# Altium PCB 探测器终.PcbDoc (part 2 of 2)
Units mil, origin at the board's own origin, x right, y up, seen from the top; angles counter-clockwise.
Board outline 3557.03 x 1964.03 mil, 2 copper layers (Top Layer, Bottom Layer); 61 components, 44 nets, 225 pads, 13 vias.
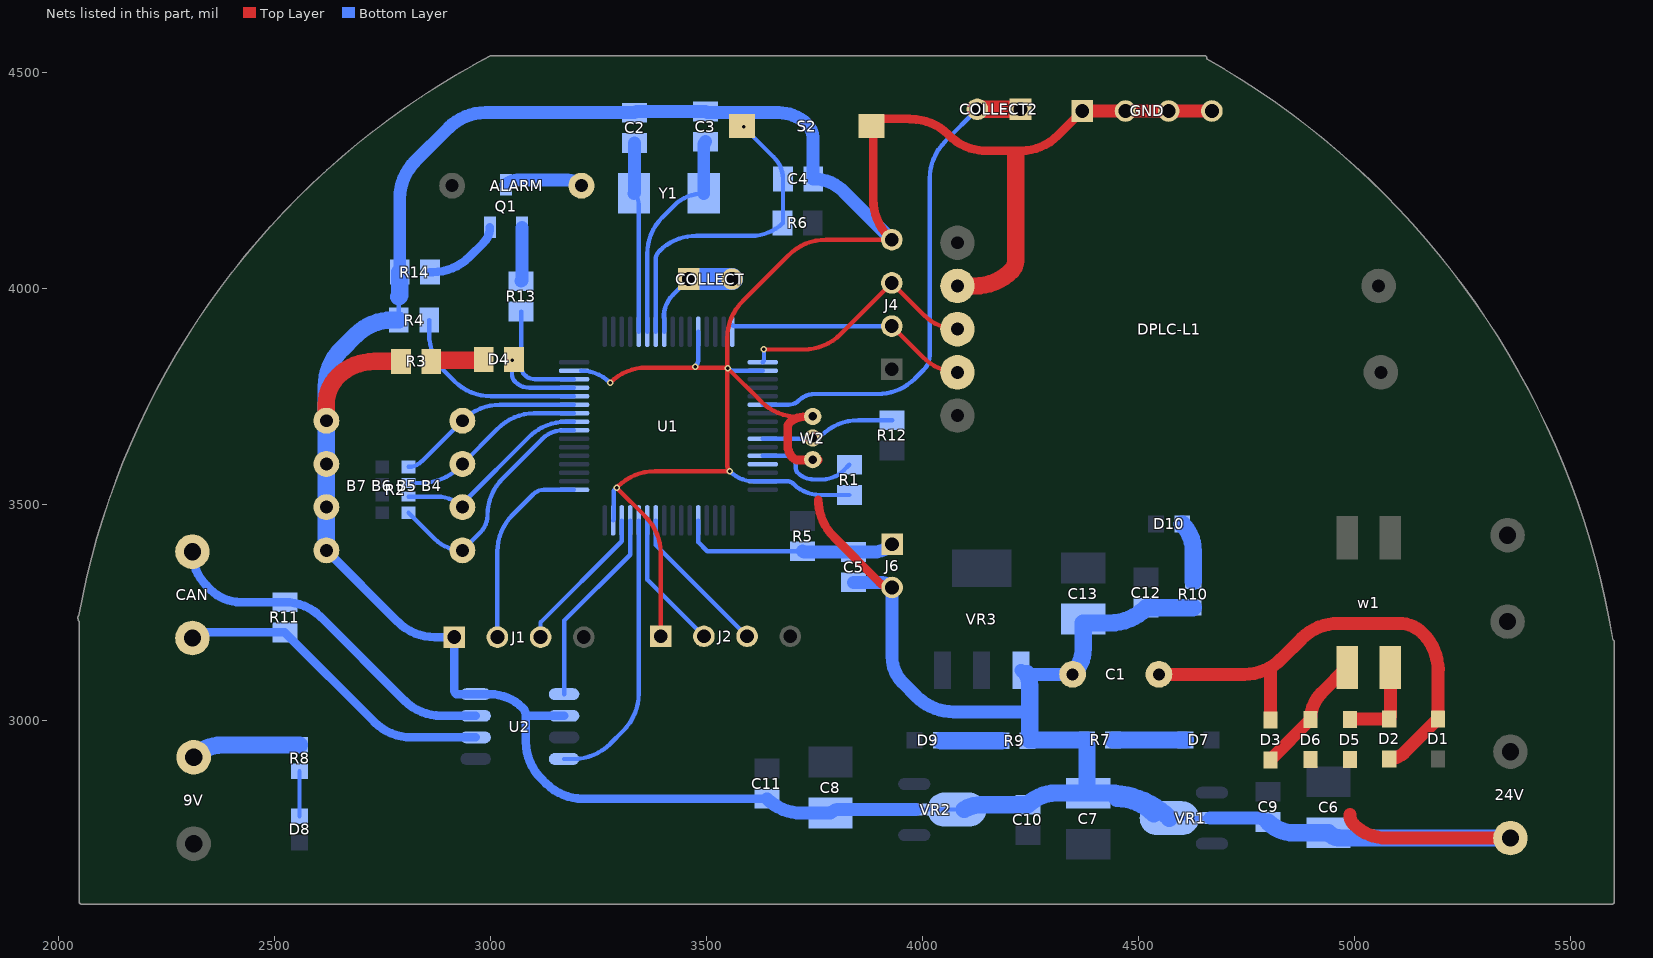
[diagram p2: the nets of this part, all layers, seen from the top]

## Via types
v1: diameter 15, hole 8, Top Layer to Bottom Layer, 8 vias
v2: diameter 137.8, hole 118.11, Top Layer to Bottom Layer, 3 vias
v3: diameter 30, hole 15, Top Layer to Bottom Layer, 1 vias
v4: diameter 50, hole 28, Top Layer to Bottom Layer, 1 vias

## Nets (pads, with @x,y where several pads share a name; then routed paths per layer and width w, separated by ;. In a path a pad name is that pad's centre, name@x,y a point inside that pad or via, vN(x,y) a via of type N, cw(c..) or ccw(c..) an arc to the next point about the centre after c; other vN are vias at no path point) (continued)
GND: 9V.2 24V.2 "B7 B6 B5 B4.5" "B7 B6 B5 B4.6" "B7 B6 B5 B4.7" "B7 B6 B5 B4.8" C1.2 C2.1 C3.1 C4.1 C5.1 C6.2 C7.2 C8.2 C9.1 C10.1 C11.1 C12.2 C13.1 D5.1 D6.1 DPLC-L1.4 GND.1 GND.2 GND.3 GND.4 J1.1 J2.1 J4.4 J6.2 R1.1 R3.1 R4.1 R7.1 R8.1 R9.1 R10.1 R14.2 S2.1 U1.12 U1.18 U1.31 U1.47 U1.63 U2.2 U2.8 VR1.2 VR2.2 VR3.1 W2.1 W2.3 | length 16067
  Top Layer w10: v1(3292.52,3540) 3359.16,3473.36 ; J2.1@3394.52,3196 3394.52,3388 ; v1@3474.52,3818 3362.02,3818 ; v1(3549.52,3817) 3627.16,3739.36 ; W2.3@3759.52,3704 3724.9,3704 3712.52,3704 ; J4.4@3929.52,4114 3776.52,4114 ; 3359.16,3473.36 cw(c3273.81,3388) 3394.52,3388 ; 3359.16,3473.36 cw(c3273.81,3388) 3394.52,3388 ; 3362.02,3818 ccw(c3362.02,3698.5) v1(3277.52,3783) cw(c3362.02,3698.5) 3362.02,3818 ; 3380.52,3578 ccw(c3380.52,3457.29) 3295.16,3542.64 cw(c3380.52,3457.29) 3380.52,3578 ; 3380.52,3578 v1(3554.52,3578) ; v1@3479.35,3818 cw(c3479.35,3824.83) v1(3474.52,3820) ccw(c3479.35,3824.83) v1@3479.35,3818 ; v1@3479.35,3818 v1@3548.52,3818 ; 3548.52,3592.49 ccw(c3569.01,3592.49) v1(3554.52,3578) ; 3548.52,3592.49 ccw(c3569.01,3592.49) v1(3554.52,3578) ; 3548.52,3592.49 v1@3548.52,3818 ; v1@3548.52,3818 3548.52,3886 ; 3548.52,3886 cw(c3669.23,3886) 3583.88,3971.36 ; 3548.52,3886 cw(c3669.23,3886) 3583.88,3971.36 ; 3583.88,3971.36 3691.16,4078.64 ; 3627.16,3739.36 ccw(c3712.52,3824.71) 3712.52,3704 ; 3627.16,3739.36 ccw(c3712.52,3824.71) 3712.52,3704 ; 3691.16,4078.64 cw(c3776.52,3993.29) 3776.52,4114 ; 3691.16,4078.64 cw(c3776.52,3993.29) 3776.52,4114
  Top Layer w20: 3759.52,3512 ccw(c3880.23,3512) 3765.91,3473.24 ; W2.1@3759.52,3604 3712.59,3604 ; J4.4@3929.52,4114 J4.4@3921.88,4121.64 ; GND.1@4370.52,4412 4313.88,4355.36 ; 3688.52,3678.93 cw(c3705.59,3678.93) 3693.52,3691 ; 3688.52,3678.93 cw(c3705.59,3678.93) 3693.52,3691 ; 3688.52,3678.93 3688.52,3637.97 ccw(c3729.49,3637.97) 3696.52,3613.65 ; 3693.52,3691 cw(c3724.9,3659.62) 3724.9,3704 ccw(c3724.9,3659.62) 3693.52,3691 ; 3696.52,3613.65 ccw(c3729.49,3637.97) 3700.52,3609 ; 3696.52,3613.65 ccw(c3729.49,3637.97) 3700.52,3609 ; 3700.52,3609 ccw(c3712.59,3621.07) 3712.59,3604 ; 3700.52,3609 ccw(c3712.59,3621.07) 3712.59,3604 ; 3765.91,3473.24 ccw(c3880.23,3512) 3794.88,3426.64 ; 3765.91,3473.24 ccw(c3880.23,3512) 3794.88,3426.64 ; 3794.88,3426.64 3900.05,3321.47 ; 3886.52,4207 ccw(c4007.23,4207) J4.4@3921.88,4121.64 ; 3886.52,4207 ccw(c4007.23,4207) J4.4@3921.88,4121.64 ; 3886.52,4207 3886.52,4394 3969.11,4394 ; 3900.05,3321.47 ccw(c3930.15,3351.57) J6.2@3930.15,3309 cw(c3930.15,3351.57) 3900.05,3321.47 ; 3969.11,4394 cw(c3969.11,4390.59) 3970.33,4393.77 cw(c3969.11,4390.59) 3971.52,4393 ; 3969.11,4394 cw(c3969.11,4390.59) 3971.52,4393 ; 3971.52,4393 3974.52,4393 ; 3974.52,4393 cw(c3974.52,4272.29) 4059.88,4357.64 ; 3974.52,4393 cw(c3974.52,4272.29) 4059.88,4357.64 ; 4059.88,4357.64 4062.16,4355.36 ; 4062.16,4355.36 ccw(c4147.52,4440.71) 4131.44,4321.08 ; 4062.16,4355.36 ccw(c4147.52,4440.71) 4131.44,4321.08 ; 4131.44,4321.08 ccw(c4147.52,4440.71) 4147.52,4320 ; 4131.44,4321.08 ccw(c4147.52,4440.71) 4147.52,4320 ; 4147.52,4320 4228.52,4320 ; 4228.52,4320 ccw(c4228.52,4440.71) 4313.88,4355.36 ; 4228.52,4320 ccw(c4228.52,4440.71) 4313.88,4355.36
  Top Layer w30: GND.1@4370.52,4412 GND.2@4470.52,4412 GND.3@4570.52,4412 GND.4@4670.52,4412 ; 4989.95,2783.1 ccw(c5022.62,2783.1) 4989.99,2781.53 ; 24V.2@5361.52,2729 5074.36,2729 ; 4989.99,2781.53 ccw(c5022.62,2783.1) 4999.52,2760 ; 4989.99,2781.53 ccw(c5022.62,2783.1) 4999.52,2760 ; 4999.52,2760 ccw(c5074.36,2834.84) 5034.88,2736.64 ; 4999.52,2760 ccw(c5074.36,2834.84) 5034.88,2736.64 ; 5034.88,2736.64 ccw(c5074.36,2834.84) 5074.36,2729 ; 5034.88,2736.64 ccw(c5074.36,2834.84) 5074.36,2729
  Top Layer w40: 2620.52,3695 2620.52,3734.21 ; R3.1@2793.48,3832.37 2731.89,3832.37 ; DPLC-L1.4@4081.52,4007 4121.52,4007 ; 4216.52,4306 4216.52,4065.64 ; 2620.52,3734.21 cw(c2709.34,3734.21) 2646.53,3797.01 ; 2620.52,3734.21 cw(c2709.34,3734.21) 2646.53,3797.01 ; 2646.53,3797.01 cw(c2731.89,3711.66) 2731.89,3832.37 ; 2646.53,3797.01 cw(c2731.89,3711.66) 2731.89,3832.37 ; 4121.52,4007 ccw(c4121.52,4127.71) 4206.88,4042.36 ; 4121.52,4007 ccw(c4121.52,4127.71) 4206.88,4042.36 ; 4206.88,4042.36 ccw(c4183.59,4065.64) 4216.52,4065.64 ; 4206.88,4042.36 ccw(c4183.59,4065.64) 4216.52,4065.64
  Bottom Layer w10: R4.1@2788.48,3928.01 2788.48,3982 ; U2.8@2999.37,3062 3020.52,3062 ; 3074.76,3030.76 3093.52,3012 ; U1.63@3210.64,3810.7 cw(c3210.64,3716.12) v1(3277.52,3783) ; U1.47@3284.57,3464.24 cw(c3284.68,3464.36) 3284.52,3464.36 3285.74,3465.58 3285.74,3533.22 v1(3292.52,3540) ; U1.12@3481.42,3901.25 3481.42,3836.65 ; U1.18@3631.02,3810.7 3564.72,3810.7 ; R1.1@3831.14,3522.96 3764.39,3522.96 ; VR2.2@3985.46,2795 VR2.2@4079.95,2795 VR2.2@4097.49,2795 ; VR1.2@4572.09,2775 VR1.2@4666.58,2775 ; 3481.42,3836.65 cw(c3457.87,3836.65) v1(3474.52,3820) ccw(c3457.87,3836.65) 3481.42,3836.65 ; 3564.72,3810.7 cw(c3564.72,3832.2) v1(3549.52,3817) ccw(c3564.72,3832.2) 3564.72,3810.7 ; U1.31@3610.54,3554.8 cw(c3610.54,3634.02) v1(3554.52,3578) ccw(c3610.54,3634.02) U1.31@3610.54,3554.8 ; U1.31@3610.54,3554.8 U1.31@3631.02,3554.8 3687.53,3554.8 ; 3687.53,3554.8 cw(c3687.53,3535.01) 3701.52,3549 ; 3687.53,3554.8 cw(c3687.53,3535.01) 3701.52,3549 ; 3701.52,3549 ccw(c3764.39,3611.87) 3764.39,3522.96 ; 3701.52,3549 ccw(c3764.39,3611.87) 3764.39,3522.96
  Bottom Layer w20: 2620.52,3395 2786.16,3229.36 ; 3093.52,3012 U2.2@3170.88,3012 ; C11.1@3640.52,2819.96 3214.49,2819.96 ; 2786.16,3229.36 ccw(c2871.52,3314.71) 2871.52,3194 ; 2786.16,3229.36 ccw(c2871.52,3314.71) 2871.52,3194 ; 2871.52,3194 J1.1@2916.52,3194 2916.52,3072.66 ; 2916.52,3072.66 ccw(c2930.18,3072.66) 2920.52,3063 ; 2916.52,3072.66 ccw(c2930.18,3072.66) 2920.52,3063 ; 2920.52,3063 ccw(c2922.93,3065.41) 2922.93,3062 ; 2920.52,3063 ccw(c2922.93,3065.41) 2922.93,3062 ; 2922.93,3062 U2.8@2966.16,3062 U2.8@2999.37,3062 ; U2.8@2999.37,3062 cw(c2999.37,2955.4) 3074.74,3030.78 ccw(c2999.37,2955.4) U2.8@2999.37,3062 ; 3082.52,3012 ccw(c3055.96,3012) 3074.76,3030.76 cw(c3055.96,3012) 3082.52,3012 ; 3082.52,3012 3082.52,2951.93 ccw(c3203.23,2951.93) 3117.88,2866.58 3129.14,2855.32 ; 3129.14,2855.32 ccw(c3214.49,2940.67) 3214.49,2819.96 ; 3129.14,2855.32 ccw(c3214.49,2940.67) 3214.49,2819.96
  Bottom Layer w30: R14.2@2790.48,4039 2790.48,4209.96 ; 3817.46,4226.06 ccw(c3747.56,4156.11) 3798.28,4241 ; 3817.48,4226.04 J4.4@3929.52,4114 ; C5.1@3841.15,3320.96 3901.28,3320.96 ; VR2.2@3985.46,2795 C8.2@3807.05,2795 ; 4238.52,3021 4072.52,3021 ; C1.2@4347.95,3108 4250.88,3108 ; VR1.2@4666.58,2775 C9.1@4778.7,2775 ; 2790.48,4209.96 cw(c2911.19,4209.96) 2825.84,4295.32 ; 2790.48,4209.96 cw(c2911.19,4209.96) 2825.84,4295.32 ; 2825.84,4295.32 2903.2,4372.68 ; 2903.2,4372.68 cw(c2988.56,4287.33) 2988.56,4408.04 ; 2903.2,4372.68 cw(c2988.56,4287.33) 2988.56,4408.04 ; 2988.56,4408.04 C2.1@3334.23,4408.04 ; C2.1@3334.23,4408.04 cw(c3341.47,4400.8) C2.1@3341.47,4411.04 ; C2.1@3334.23,4408.04 cw(c3341.47,4400.8) C2.1@3341.47,4411.04 ; C2.1@3341.47,4411.04 C3.1@3498.23,4411.04 ; C3.1@3498.23,4411.04 ccw(c3505.57,4418.38) C3.1@3505.57,4408 ; C3.1@3498.23,4411.04 ccw(c3505.57,4418.38) C3.1@3505.57,4408 ; C3.1@3505.57,4408 3668.34,4408 ; 3668.34,4408 cw(c3668.34,4315.82) 3709.03,4398.53 ; 3668.34,4408 cw(c3668.34,4315.82) 3709.03,4398.53 ; 3709.03,4398.53 cw(c3668.34,4315.82) 3733.52,4381 cw(c3699.62,4347.1) 3745,4362.56 ; 3720.3,2786.91 cw(c3720.3,2899.74) C11.1@3640.52,2819.96 ccw(c3720.3,2899.74) 3720.3,2786.91 ; 3720.3,2786.91 C8.2@3787.52,2786.91 ; 3745,4362.56 cw(c3699.62,4347.1) 3747.56,4347.1 ; 3745,4362.56 cw(c3699.62,4347.1) 3747.56,4347.1 ; C4.1@3747.56,4255 cw(c3747.56,4156.11) 3798.28,4241 ; C4.1@3747.56,4255 cw(c3747.56,4156.11) 3798.28,4241 ; C4.1@3747.56,4255 3747.56,4347.1 ; C8.2@3787.52,2786.91 cw(c3807.05,2767.39) C8.2@3807.05,2795 ; C8.2@3787.52,2786.91 cw(c3807.05,2767.39) C8.2@3807.05,2795 ; 3901.28,3320.96 cw(c3901.28,3280.13) J6.2@3930.15,3309 ; 3901.28,3320.96 cw(c3901.28,3280.13) J6.2@3930.15,3309 ; J6.2@3930.15,3309 3930.15,3147.83 ccw(c4013.35,3147.83) 3944.72,3100.8 ; 3944.72,3100.8 ccw(c4013.35,3147.83) 3954.52,3089 ; 3944.72,3100.8 ccw(c4013.35,3147.83) 3954.52,3089 ; 3954.52,3089 3987.16,3056.36 ; 3987.16,3056.36 ccw(c4072.52,3141.71) 4001.19,3044.33 ; 3987.16,3056.36 ccw(c4072.52,3141.71) 4001.19,3044.33 ; 4001.19,3044.33 ccw(c4072.52,3141.71) 4072.52,3021 ; 4001.19,3044.33 ccw(c4072.52,3141.71) 4072.52,3021 ; VR3.1@4242.51,3109.1 ccw(c4250.88,3140.26) 4250.88,3108 ; VR3.1@4242.51,3109.1 ccw(c4250.88,3140.26) 4250.88,3108 ; VR3.1@4242.51,3109.1 cw(c4250.88,3140.26) VR3.1@4228.07,3117.45 ccw(c4250.88,3140.26) VR3.1@4242.51,3109.1 ; C9.1@4778.7,2775 cw(c4778.7,2744.14) C9.1@4800.52,2765.96 ccw(c4778.7,2744.14) C9.1@4778.7,2775
  Bottom Layer w40: 9V.2@2303.52,2918 9V.2@2315.52,2918 ; R8.1@2558.52,2944.31 2379.04,2944.31 ; 2620.52,3395 2620.52,3495 2620.52,3595 2620.52,3695 2620.52,3775 ; R4.1@2788.48,3928.01 R4.1@2773.53,3928.01 ; R14.2@2790.48,4039 2790.48,3986.83 ; 4450.8,2820.4 cw(c4450.8,2699.69) VR1.2@4536.16,2785.04 ; VR1.2@4572.09,2775 ccw(c4431.93,2634.84) 4431.93,2833.06 C7.2@4384.52,2833.06 ; 24V.2@5361.52,2729 C6.2@4969.36,2729 ; 9V.2@2315.52,2918 cw(c2379.04,2854.48) 2379.04,2944.31 ; 9V.2@2315.52,2918 cw(c2379.04,2854.48) 2379.04,2944.31 ; 2620.52,3775 cw(c2741.23,3775) 2655.88,3860.36 ; 2620.52,3775 cw(c2741.23,3775) 2655.88,3860.36 ; 2655.88,3860.36 2688.17,3892.65 ; 2688.17,3892.65 cw(c2773.53,3807.3) R4.1@2773.53,3928.01 ; 2688.17,3892.65 cw(c2773.53,3807.3) R4.1@2773.53,3928.01 ; 2790.48,3986.83 cw(c2783.65,3986.83) 2790.46,3986.36 cw(c2783.65,3986.83) 2788.49,3982.01 ccw(c2783.65,3986.83) 2790.48,3986.83 ; VR2.2@4136.73,2806.04 ccw(c4136.73,2730.79) 4097.49,2795 cw(c4136.73,2730.79) VR2.2@4136.73,2806.04 ; VR2.2@4136.73,2806.04 C10.1@4244.52,2806.04 ; C10.1@4244.52,2806.04 cw(c4309.74,2740.82) 4309.74,2833.06 ; C10.1@4244.52,2806.04 cw(c4309.74,2740.82) 4309.74,2833.06 ; 4248.66,3082.2 ccw(c4186.72,3082.2) 4242.51,3109.1 cw(c4186.72,3082.2) 4248.66,3082.2 ; 4248.66,3082.2 4248.66,2956 R7.1@4381.21,2956 C7.2@4381.21,2841.06 ; 4309.74,2833.06 C7.2@4384.52,2833.06 ; 4372.52,3167.32 cw(c4288.63,3167.32) C1.2@4347.95,3108 ccw(c4288.63,3167.32) 4372.52,3167.32 ; 4372.52,3167.32 4372.52,3227 4434.12,3227 ; C7.2@4381.21,2841.06 ccw(c4392.52,2841.06) C7.2@4384.52,2833.06 ; C7.2@4381.21,2841.06 ccw(c4392.52,2841.06) C7.2@4384.52,2833.06 ; 4434.12,3227 ccw(c4434.12,3346.36) C12.2@4518.52,3261.96 ; 4434.12,3227 ccw(c4434.12,3346.36) C12.2@4518.52,3261.96 ; C12.2@4518.52,3261.96 R10.1@4625.77,3261.96 ; R10.1@4625.77,3261.96 ccw(c4625.77,3264.44) R10.1@4627.52,3262.69 cw(c4625.77,3264.44) R10.1@4625.77,3261.96 ; 4860.91,2740.95 cw(c4860.91,2826.35) C9.1@4800.52,2765.96 ccw(c4860.91,2826.35) 4860.91,2740.95 ; 4860.91,2740.95 C6.2@4940.52,2740.95 ; C6.2@4940.52,2740.95 ccw(c4969.36,2769.79) C6.2@4969.36,2729 ; C6.2@4940.52,2740.95 ccw(c4969.36,2769.79) C6.2@4969.36,2729
NetC1_1: C1.1 D1.1 D2.2 D3.2 | length 1560
  Top Layer w20: 5104.35,2921.83 cw(c5080.95,2945.24) D2.2@5094.51,2915.05 ; D2.2@5094.51,2915.05 cw(c5080.95,2945.24) D2.2@5080.95,2912.14 ccw(c5080.95,2945.24) D2.2@5094.51,2915.05
  Top Layer w30: C1.1@4547.95,3108 4745.52,3108 ; D3.2@4806.52,3002.46 4806.52,3115.59 ; 5194.52,3121 5194.52,3118.95 ; 4745.52,3108 ccw(c4745.52,3228.71) 4830.88,3143.36 ; 4745.52,3108 ccw(c4745.52,3228.71) 4830.88,3143.36 ; 4806.52,3115.59 ccw(c4803.11,3115.59) 4805.52,3118 cw(c4803.11,3115.59) 4806.52,3115.59 ; 4830.88,3143.36 4878.16,3190.64 ; 4878.16,3190.64 cw(c4963.52,3105.29) 4952.56,3225.5 ; 4878.16,3190.64 cw(c4963.52,3105.29) 4952.56,3225.5 ; 4952.56,3225.5 cw(c4963.52,3105.29) 4963.52,3226 ; 4952.56,3225.5 cw(c4963.52,3105.29) 4963.52,3226 ; 4963.52,3226 5102.89,3226 ; 5102.89,3226 cw(c5102.89,3147.22) 5158.59,3202.93 ; 5102.89,3226 cw(c5102.89,3147.22) 5158.59,3202.93 ; 5115.24,2926.34 cw(c5080.95,2960.63) D2.2@5080.95,2912.14 ccw(c5080.95,2960.63) 5115.24,2926.34 ; 5115.24,2926.34 D1.1@5193.95,3005.05 5193.95,3117.57 ; 5158.59,3202.93 cw(c5073.24,3117.57) 5193.95,3117.57 ; 5158.59,3202.93 cw(c5073.24,3117.57) 5193.95,3117.57 ; 5193.95,3117.57 ccw(c5192.57,3118.95) 5194.52,3118.93 ; 5193.95,3117.57 ccw(c5192.57,3118.95) 5194.52,3118.95
NetC2_2: C2.2 U1.5 Y1.2 | length 472.8
  Bottom Layer w10: U1.5@3343.62,3901.25 Y1.2@3343.62,4195.28 ; Y1.2@3343.62,4195.28 ccw(c3306.71,4195.28) Y1.2@3332.81,4221.38 cw(c3306.71,4195.28) Y1.2@3343.62,4195.28
  Bottom Layer w30: C2.2@3334.23,4337.96 Y1.2@3334.23,4224.79 ; Y1.2@3334.23,4224.79 cw(c3329.39,4224.79) Y1.2@3332.81,4221.38 ccw(c3329.39,4224.79) Y1.2@3334.23,4224.79
NetC3_2: C3.2 U1.6 Y1.1 | length 691.3
  Bottom Layer w10: U1.6@3363.31,3901.25 3363.31,4080.79 ; 3363.31,4080.79 cw(c3484.02,4080.79) 3398.66,4166.14 ; 3363.31,4080.79 cw(c3484.02,4080.79) 3398.66,4166.14 ; 3398.66,4166.14 3425.38,4192.86 ; 3425.38,4192.86 cw(c3494.23,4124.01) Y1.1@3494.23,4221.38 ccw(c3494.23,4124.01) 3425.38,4192.86
  Bottom Layer w30: Y1.1@3494.23,4221.38 C3.2@3494.23,4331.3 ; C3.2@3494.23,4331.3 cw(c3507.88,4331.3) C3.2@3498.23,4340.96 ccw(c3507.88,4331.3) C3.2@3494.23,4331.3
NetC4_2: C4.2 R6.2 S2.2 U1.7 | length 1070.8
  Top Layer w10: v1(3586.52,4375) S2.2@3586.52,4394
  Bottom Layer w10: U1.7@3382.99,3901.25 3382.99,4067.91 ; v1(3586.52,4375) 3656.95,4304.57 ; R6.2@3677.56,4153 3677.56,4203 3677.48,4203.08 ; 3382.99,4067.91 cw(c3410.9,4067.91) 3391.16,4087.64 ; 3382.99,4067.91 cw(c3410.9,4067.91) 3391.16,4087.64 ; 3391.16,4087.64 cw(c3476.52,4002.29) 3408.48,4102 ; 3391.16,4087.64 cw(c3476.52,4002.29) 3408.48,4102 ; 3408.48,4102 cw(c3476.52,4002.29) 3476.52,4123 ; 3408.48,4102 cw(c3476.52,4002.29) 3476.52,4123 ; 3476.52,4123 3605.05,4123 ; 3605.05,4123 ccw(c3605.05,4225.43) R6.2@3676.47,4152 ; 3605.05,4123 ccw(c3605.05,4225.43) R6.2@3676.47,4152 ; 3656.95,4304.57 cw(c3607.37,4255) C4.2@3677.48,4255 ; 3656.95,4304.57 cw(c3607.37,4255) C4.2@3677.48,4255 ; R6.2@3676.47,4152 ccw(c3605.05,4225.43) R6.2@3677.48,4153 ; R6.2@3676.47,4152 ccw(c3605.05,4225.43) R6.2@3677.48,4153 ; R6.2@3677.48,4153 3677.48,4203.08 ; 3677.48,4203.08 C4.2@3677.48,4255 ; C4.2@3677.48,4255 cw(c3677.29,4254.81) 3677.56,4254.81 ccw(c3677.29,4254.81) C4.2@3677.48,4255
NetC5_2: C5.2 J6.1 R5.1 U1.37 | length 566.3
  Bottom Layer w10: U1.37@3481.42,3464.24 3481.42,3414.06 3502.52,3392.96 R5.1@3723.15,3392.96
  Bottom Layer w30: R5.1@3727.79,3391.04 cw(c3727.79,3397.6) R5.1@3723.15,3392.96 ccw(c3727.79,3397.6) R5.1@3727.79,3391.04 ; R5.1@3727.79,3391.04 C5.2@3841.15,3391.04 3886.79,3391.04 ; 3886.79,3391.04 ccw(c3886.79,3452.36) J6.1@3930.15,3409 cw(c3886.79,3452.36) 3886.79,3391.04
NetD2_1: D2.1 D5.2 w1.3 | length 222.2
  Top Layer w10: D5.2@4989.95,3003.46 D5.2@4993.52,3003.46
  Top Layer w30: w1.3@5083.52,3124 D2.1@5083.52,3011.26 ; D5.2@4997.38,3005.05 ccw(c4997.38,2999.6) 4993.52,3003.46 cw(c4997.38,2999.6) D5.2@4997.38,3005.05 ; D5.2@4997.38,3005.05 D2.1@5080.95,3005.05 ; D2.1@5080.95,3005.05 ccw(c5074.75,3011.26) D2.1@5083.52,3011.26 ; D2.1@5080.95,3005.05 ccw(c5074.75,3011.26) D2.1@5083.52,3011.26
NetD3_1: D3.1 D6.2 w1.4 | length 352.1
  Top Layer w30: D3.1@4806.52,2909.54 cw(c4810.1,2909.54) 4807.57,2912.07 D6.2@4898.95,3003.46 ; w1.4@4983.52,3124 4924.39,3064.87 ; D6.2@4898.95,3003.46 cw(c4985.8,3003.46) 4924.39,3064.87 ; D6.2@4898.95,3003.46 cw(c4985.8,3003.46) 4924.39,3064.87
NetD4_K: D4.K R3.2 | length 128.7
  Top Layer w40: D4.K@2984.52,3835 R3.2@2869.91,3835 ; R3.2@2869.91,3835 ccw(c2869.91,3826.02) R3.2@2863.56,3832.37 cw(c2869.91,3826.02) R3.2@2869.91,3835
NetD7_K: D7.K R7.2 | length 167.4
  Bottom Layer w40: R7.2@4441.84,2956 D7.K@4609.21,2956
NetD8_K: D8.K R8.2 | length 104.4
  Bottom Layer w10: D8.K@2558.52,2779.31 R8.2@2558.52,2883.68
NetD9_K: D9.K R9.2 | length 140.6
  Bottom Layer w40: D9.K@4042.83,2955 ccw(c4045.25,2957.41) 4045.25,2954 R9.2@4183.2,2954
NetD10_K: D10.K R10.2 | length 208.4
  Bottom Layer w40: R10.2@4627.52,3323.32 4627.52,3393.99 ; 4627.52,3393.99 ccw(c4539.82,3393.99) D10.K@4601.83,3456 cw(c4539.82,3393.99) 4627.52,3393.99
NetJ7_1: CAN.1 R11.2 U2.6 | length 899.9
  Bottom Layer w20: CAN.1@2307.52,3182 cw(c2362.95,3126.57) CAN.1@2319.79,3192.01 ; U2.6@2966.16,2962 2817.48,2962 ; CAN.1@2341.78,3204.96 ccw(c2341.78,3160.75) CAN.1@2310.52,3192.01 cw(c2341.78,3160.75) CAN.1@2341.78,3204.96 ; CAN.1@2341.78,3204.96 R11.2@2524.52,3204.96 2732.12,2997.36 ; 2732.12,2997.36 ccw(c2817.48,3082.71) 2817.48,2962 ; 2732.12,2997.36 ccw(c2817.48,3082.71) 2817.48,2962
NetJ7_2: CAN.2 R11.1 U2.7 | length 1086
  Bottom Layer w20: CAN.2@2310.52,3392.01 ccw(c2421.6,3392.01) 2343.05,3313.47 2352.52,3304 ; U2.7@2966.16,3012 2886.52,3012 ; 2352.52,3304 ccw(c2422.44,3373.92) 2422.44,3275.04 ; 2352.52,3304 ccw(c2422.44,3373.92) 2422.44,3275.04 ; 2422.44,3275.04 R11.1@2524.52,3275.04 ; R11.1@2524.52,3275.04 cw(c2524.52,3156.84) 2608.1,3240.42 ; R11.1@2524.52,3275.04 cw(c2524.52,3156.84) 2608.1,3240.42 ; 2608.1,3240.42 2801.16,3047.36 ; 2801.16,3047.36 ccw(c2886.52,3132.71) 2886.52,3012 ; 2801.16,3047.36 ccw(c2886.52,3132.71) 2886.52,3012
NetQ1_1: Q1.1 R13.2 | length 131.8
  Bottom Layer w30: Q1.1@3073.92,4142.8 R13.2@3073.92,4023.84 ; R13.2@3073.92,4023.84 cw(c3065.72,4023.84) R13.2@3071.52,4018.04 ccw(c3065.72,4023.84) R13.2@3073.92,4023.84
NetQ1_2: Q1.2 R14.1 | length 281.4
  Bottom Layer w20: R14.1@2860.56,4039 R14.1@2866.52,4039 ; Q1.2@2999.12,4142.8 cw(c2947.94,4142.8) 2984.13,4106.61 2951.88,4074.36 ; R14.1@2866.52,4039 ccw(c2866.52,4159.71) 2951.88,4074.36 ; R14.1@2866.52,4039 ccw(c2866.52,4159.71) 2951.88,4074.36
NetQ1_3: ALARM.2 Q1.3 | length 244.7
  Bottom Layer w30: 3062.54,4252 ccw(c3062.54,4215.2) Q1.3@3036.52,4241.22 cw(c3062.54,4215.2) 3062.54,4252 ; 3062.54,4252 3179.74,4252 ; 3179.74,4252 cw(c3179.74,4207.62) ALARM.2@3211.13,4239 ccw(c3179.74,4207.62) 3179.74,4252
NetR2_5: "B7 B6 B5 B4.4" R2.5 U1.59 | length 564.3
  Bottom Layer w10: U1.59@3194.02,3731.96 3022.48,3731.96 ; 2841.28,3600.76 cw(c2810.84,3631.2) R2.5@2810.84,3588.15 ccw(c2810.84,3631.2) 2841.28,3600.76 ; 2841.28,3600.76 2935.52,3695 2937.12,3696.6 ; 2937.12,3696.6 cw(c3022.48,3611.25) 3022.48,3731.96 ; 2937.12,3696.6 cw(c3022.48,3611.25) 3022.48,3731.96
NetR2_6: "B7 B6 B5 B4.3" R2.6 U1.58 | length 630.9
  Bottom Layer w10: R2.6@2810.84,3550.75 2841.27,3550.75 ; 3101.24,3712.28 3102.8,3712.28 ; U1.58@3194.02,3712.28 3102.8,3712.28 ; 2841.27,3550.75 ccw(c2841.27,3671.46) 2926.62,3586.1 ; 2841.27,3550.75 ccw(c2841.27,3671.46) 2926.62,3586.1 ; 2926.62,3586.1 2935.52,3595 3017.44,3676.92 ; 3017.44,3676.92 cw(c3102.8,3591.57) 3101.24,3712.27 ; 3017.44,3676.92 cw(c3102.8,3591.57) 3101.25,3712.27 ; 3101.25,3712.27 cw(c3102.8,3591.57) 3102.8,3712.28 ; 3101.25,3712.27 cw(c3102.8,3591.57) 3102.8,3712.28
NetR2_7: "B7 B6 B5 B4.2" R2.7 U1.57 | length 645.2
  Bottom Layer w10: R2.7@2810.84,3519.25 2876.97,3519.25 ; U1.57@3194.02,3692.59 U1.57@3175.11,3692.59 ; 2876.97,3519.25 cw(c2876.97,3436.45) 2935.5,3495.02 ; 2876.97,3519.25 cw(c2876.97,3436.45) 2935.5,3495.02 ; 2935.52,3495 cw(c2954.83,3495) 2941.18,3508.66 ; 2935.52,3495 cw(c2954.83,3495) 2941.18,3508.66 ; 2941.18,3508.66 3089.75,3657.23 ; 3089.75,3657.23 cw(c3175.11,3571.88) 3119.58,3679.06 ; 3089.75,3657.23 cw(c3175.11,3571.88) 3119.58,3679.06 ; 3119.58,3679.06 cw(c3175.11,3571.88) U1.57@3175.11,3692.59 ; 3119.58,3679.06 cw(c3175.11,3571.88) U1.57@3175.11,3692.59
NetR2_8: "B7 B6 B5 B4.1" R2.8 U1.56 | length 826.1
  Bottom Layer w10: R2.8@2810.84,3481.85 2870.93,3421.75 ; U1.56@3194.02,3672.91 U1.56@3168.58,3672.91 ; 2870.93,3421.75 ccw(c2935.52,3486.34) 2935.52,3395 ; 2870.93,3421.75 ccw(c2935.52,3486.34) 2935.52,3395 ; 2935.52,3395 2977.26,3436.74 ; 2977.26,3436.74 ccw(c2937.99,3476) 2993.52,3476 ; 2977.26,3436.74 ccw(c2937.99,3476) 2993.52,3476 ; 2993.52,3476 cw(c3114.23,3476) 3028.88,3561.36 ; 2993.52,3476 cw(c3114.23,3476) 3028.88,3561.36 ; 3028.88,3561.36 3120.52,3653 ; 3120.52,3653 cw(c3168.58,3604.94) U1.56@3168.58,3672.91 ; 3120.52,3653 cw(c3168.58,3604.94) U1.56@3168.58,3672.91
NetR4_2: R4.2 U1.60 | length 636.4
  Bottom Layer w10: R4.2@2858.56,3928.01 2858.56,3894.96 ; U1.60@3194.02,3751.65 3001.87,3751.65 ; 2858.56,3894.96 ccw(c2979.27,3894.96) 2893.92,3809.6 ; 2858.56,3894.96 ccw(c2979.27,3894.96) 2893.92,3809.6 ; 2893.92,3809.6 2916.52,3787 ; 2916.52,3787 ccw(c3001.87,3872.36) 3001.87,3751.65 ; 2916.52,3787 ccw(c3001.87,3872.36) 3001.87,3751.65
PA6: COLLECT2.1 COLLECT2.2 U1.22 | length 1416.7
  Top Layer w40: COLLECT2.2@4127.52,4416 COLLECT2.1@4227.52,4416
  Bottom Layer w10: U1.22@3631.02,3731.96 3690.28,3731.96 ccw(c3690.28,3766.24) 3690.48,3731.96 ccw(c3690.28,3766.24) 3714.52,3742 ; COLLECT2.2@4122.52,4416 COLLECT2.2@4127.52,4416 4052.88,4341.36 ; 3714.52,3742 cw(c3750.73,3705.79) 3750.73,3757 ; 3714.52,3742 cw(c3750.73,3705.79) 3750.73,3757 ; 3750.73,3757 3897.52,3757 ; 3897.52,3757 ccw(c3897.52,3877.71) 3955.8,3772 ; 3897.52,3757 ccw(c3897.52,3877.71) 3955.8,3772 ; 3955.8,3772 ccw(c3897.52,3877.71) 3982.88,3792.36 ; 3955.8,3772 ccw(c3897.52,3877.71) 3982.88,3792.36 ; 3982.88,3792.36 4003.52,3813 ; 4003.52,3813 ccw(c3969.72,3846.8) 4017.52,3846.8 ; 4003.52,3813 ccw(c3969.72,3846.8) 4017.52,3846.8 ; 4017.52,3846.8 4017.52,4256 ; 4017.52,4256 cw(c4138.23,4256) 4052.88,4341.36 ; 4017.52,4256 cw(c4138.23,4256) 4052.88,4341.36
PA9: J2.3 U1.42 | length 355.9
  Bottom Layer w10: U1.42@3382.99,3464.24 3382.99,3407.53 J2.3@3594.52,3196
PA10: J2.2 U1.43 | length 322.6
  Bottom Layer w10: U1.43@3363.31,3464.24 3363.31,3327.21 J2.2@3494.52,3196
PA11: U1.44 U2.4 | length 845
  Bottom Layer w10: U2.4@3170.88,2912 U2.4@3192.52,2912 ; U1.44@3343.62,3464.24 3343.62,3063.1 ; U2.4@3192.52,2912 ccw(c3192.52,3032.71) 3277.88,2947.36 ; U2.4@3192.52,2912 ccw(c3192.52,3032.71) 3277.88,2947.36 ; 3277.88,2947.36 3308.27,2977.75 ; 3308.27,2977.75 ccw(c3222.91,3063.1) 3343.62,3063.1 ; 3308.27,2977.75 ccw(c3222.91,3063.1) 3343.62,3063.1
PA12: U1.45 U2.1 | length 466
  Bottom Layer w10: U2.1@3170.88,3062 3171.52,3062 3171.52,3232.58 3323.94,3385 U1.45@3323.94,3464.24
PA13: J1.3 U1.46 | length 348
  Bottom Layer w10: J1.3@3116.52,3194 3116.52,3228.27 3304.25,3416 U1.46@3304.25,3464.24
PA14: J1.2 U1.49 | length 579.3
  Bottom Layer w10: J1.2@3016.52,3194 3016.52,3392 ; U1.49@3194.02,3535.11 3123.93,3535.11 ; 3016.52,3392 cw(c3137.23,3392) 3051.88,3477.36 ; 3016.52,3392 cw(c3137.23,3392) 3051.88,3477.36 ; 3051.88,3477.36 3099.52,3525 ; 3099.52,3525 cw(c3123.93,3500.59) 3123.93,3535.11 ; 3099.52,3525 cw(c3123.93,3500.59) 3123.93,3535.11
PB0: R12.1 U1.26 W2.2 | length 408.8
  Bottom Layer w10: U1.26@3631.02,3653.22 W2.2@3757.64,3653.22 ; R12.1@3930.52,3696.04 3851.56,3696.04 ; W2.2@3757.64,3653.22 ccw(c3757.64,3655.88) W2.2@3759.52,3654 ; W2.2@3757.64,3653.22 ccw(c3757.64,3655.88) W2.2@3759.52,3654 ; W2.2@3759.52,3654 3766.2,3660.68 ; 3766.2,3660.68 cw(c3851.56,3575.33) 3851.56,3696.04 ; 3766.2,3660.68 cw(c3851.56,3575.33) 3851.56,3696.04
PB2: R1.2 U1.28 | length 376.8
  Bottom Layer w10: U1.28@3631.02,3613.85 3681.57,3613.85 ; 3712.52,3574 3711.06,3575.46 cw(c3719.59,3584) 3707.52,3584 3707.52,3589.1 ; R1.2@3831.14,3593.04 R1.2@3818.02,3579.92 ; 3681.57,3613.85 cw(c3681.57,3587.05) 3700.52,3606 ; 3681.57,3613.85 cw(c3681.57,3587.05) 3700.52,3606 ; 3700.52,3606 cw(c3683.62,3589.1) 3707.52,3589.1 ; 3700.52,3606 cw(c3683.62,3589.1) 3707.52,3589.1 ; 3733.1,3561.44 cw(c3748.73,3610.21) 3712.53,3573.99 ccw(c3748.73,3610.21) 3733.1,3561.44 ; 3733.1,3561.44 ccw(c3748.73,3610.21) 3748.73,3559 ; 3733.1,3561.44 ccw(c3748.73,3610.21) 3748.73,3559 ; 3748.73,3559 3767.52,3559 ; 3767.52,3559 ccw(c3767.52,3630.41) 3785.09,3561.2 ; 3767.52,3559 ccw(c3767.52,3630.41) 3785.09,3561.2 ; 3785.09,3561.2 ccw(c3767.52,3630.41) R1.2@3818.02,3579.92 ; 3785.09,3561.2 ccw(c3767.52,3630.41) R1.2@3818.02,3579.92
PB8: D4.A U1.61 | length 232.7
  Top Layer w10: D4.A@3055.04,3835 D4.A@3055.04,3837 D4.A@3055.04,3835
  Bottom Layer w10: v1(3050.52,3835) 3050.52,3801.9 ccw(c3074.42,3801.9) 3057.52,3785 ; U1.61@3194.02,3771.33 3090.52,3771.33 ; 3057.52,3785 ccw(c3090.52,3818) 3090.52,3771.33 ; 3057.52,3785 ccw(c3090.52,3818) 3090.52,3771.33
PB9: R13.1 U1.62 | length 314.5
  Bottom Layer w10: R13.1@3071.52,3947.96 3071.52,3820.31 ; U1.62@3194.02,3791.02 3103.62,3791.02 ; 3071.52,3820.31 ccw(c3098.83,3820.31) 3079.52,3801 ; 3071.52,3820.31 ccw(c3098.83,3820.31) 3079.52,3801 ; 3079.52,3801 ccw(c3103.62,3825.1) 3103.62,3791.02 ; 3079.52,3801 ccw(c3103.62,3825.1) 3103.62,3791.02
PB10: U1.29
PC0: COLLECT.1 COLLECT.2 U1.8 | length 315.7
  Bottom Layer w10: U1.8@3402.68,3901.25 3402.68,3947.97 ; COLLECT.1@3459.52,4023 3423.26,3986.74 ; 3402.68,3947.97 cw(c3476.23,3933.77) 3423.26,3986.74 ; 3402.68,3947.97 ccw(c3476.23,3933.77) 3401.32,3933.77 cw(c3476.23,3933.77) 3402.68,3947.97 ; 3402.68,3947.97 cw(c3476.23,3933.77) 3423.26,3986.74
  Bottom Layer w50: COLLECT.1@3459.52,4023 COLLECT.2@3559.52,4023
RX1: DPLC-L1.3 J4.3 U1.17 | length 763.3
  Top Layer w10: v1(3633.52,3860) 3725.52,3860 ; 3725.52,3860 ccw(c3725.52,3980.71) 3810.88,3895.36 ; 3725.52,3860 ccw(c3725.52,3980.71) 3810.88,3895.36 ; 3810.88,3895.36 J4.3@3929.52,4014 4004.7,3938.82 ; 4004.7,3938.82 ccw(c4081.52,4015.64) DPLC-L1.3@4081.52,3907 cw(c4081.52,4015.64) 4004.7,3938.82
  Bottom Layer w10: v1(3633.52,3860) 3633.52,3836.41 ; 3633.52,3836.41 cw(c3625,3836.41) U1.17@3631.02,3830.39 ccw(c3625,3836.41) 3633.52,3836.41
TX1: DPLC-L1.2 J4.2 U1.16 | length 667.8
  Top Layer w10: J4.2@3929.52,3914 4001.16,3842.36 ; DPLC-L1.2@4089.52,3807 DPLC-L1.2@4086.52,3807 ; 4001.16,3842.36 ccw(c4086.52,3927.71) DPLC-L1.2@4081.41,3807.11 ; 4001.16,3842.36 ccw(c4086.52,3927.71) DPLC-L1.2@4081.41,3807.11 ; DPLC-L1.2@4081.41,3807.11 ccw(c4086.52,3927.71) DPLC-L1.2@4086.52,3807 ; DPLC-L1.2@4081.41,3807.11 ccw(c4086.52,3927.71) DPLC-L1.2@4086.52,3807
  Bottom Layer w10: J4.2@3929.52,3914 3566.35,3914 ; 3566.35,3914 cw(c3566.35,3920.83) 3561.52,3916 ccw(c3566.35,3920.83) 3566.35,3914
pads on no net: DPLC-L1.5 U1.2 U1.3 U1.4 U1.9 U1.10 U1.11 U1.14 U1.15 U1.20 U1.21 U1.23 U1.24 U1.25 U1.27 U1.30 U1.33 U1.34 U1.35 U1.36 U1.38 U1.39 U1.40 U1.41 U1.50 U1.51 U1.52 U1.53 U1.54 U1.55 U2.5
copper on no net:
  other v2: 3037.78,2777.85 3628.33,3014.07 2525.97,4037.69

## Polygon pours and split planes (outlines as drawn)
24V on Bottom Layer "Bottom Overlay-No Net" (solid, pour order 54): 5402.52,2933 5402.52,2887.97 cw(c5361.55,2887.97) 5390.52,2859 5385.81,2854.29 cw(c5315.1,2925) 5315.1,2825 4952.52,2825 4849.08,2825 ccw(c4849.08,2787.44) 4822.52,2814 ccw(c4817.69,2809.17) 4817.69,2816 4784.52,2816 4760.73,2816 cw(c4760.73,2867.21) 4724.52,2831 4691.52,2831 cw(c4691.52,2835.83) 4688.11,2832.41 4665.52,2855 cw(c4701.73,2891.21) 4650.52,2891.21 4650.52,2963 4650.52,3031.79 cw(c4701.73,3031.79) 4665.52,3068 4692.23,3094.71 cw(c4762.94,3024) 4762.94,3124 4874.52,3124 5342.65,3124 cw(c5342.65,3059.13) 5388.52,3105 cw(c5354.72,3071.2) 5402.52,3071.2 5402.52,2932
3.3V on Bottom Layer "AutoNaming" (solid, remove dead copper, pour order 70): 4561.52,3458 ccw(c4570.72,3448.8) 4557.71,3448.8 4557.71,3436.69 ccw(c4582.31,3412.09) 4547.52,3412.09 4547.52,3348 4547.52,3346.8 cw(c4499.72,3346.8) 4533.52,3313 4533.18,3312.66 4530.35,3312.66 ccw(c4530.35,3300.17) 4521.52,3309 4490.03,3309 ccw(c4463.93,3283.55) 4463.93,3320 4402.52,3320 4222.96,3320 ccw(c4222.96,3296.65) 4206.45,3313.16 ccw(c4153.72,3260.44) 4153.72,3335 4150.52,3335 4149.76,3335 cw(c4149.76,3345.24) 4142.52,3338 cw(c4077.34,3403.18) 4077.34,3311 4068.52,3311 4068.52,3385.62 ccw(c4024.14,3385.62) 4055.52,3417 4052.81,3419.71 ccw(c3982.1,3349) 3982.1,3449 3778.52,3449 3764.97,3449 ccw(c3764.97,3431.32) 3752.47,3443.82 cw(c3748.07,3448.22) 3748.07,3442 3692.52,3442 cw(c3692.52,3451.66) 3685.69,3444.83 3629.52,3501 ccw(c3569.16,3440.64) 3569.16,3526 3537.52,3526 cw(c3537.52,3579.11) 3499.96,3541.56 3494.52,3547 3492.81,3548.71 ccw(c3422.1,3478) 3422.1,3578 3314.52,3578 ccw(c3314.52,3556.27) 3299.16,3571.64 3269.52,3542 cw(c3284.01,3556.49) 3263.52,3556.49 3263.52,3599 3263.52,3632.76 ccw(c3253.28,3632.76) 3260.52,3640 3260.52,3685.06 cw(c3342.46,3685.06) 3284.52,3743 3287.55,3746.03 ccw(c3246.58,3787) 3304.52,3787 ccw(c3292.45,3787) 3300.98,3795.54 3293.52,3803 ccw(c3239.67,3749.15) 3239.67,3825.31 3226.04,3825.31 ccw(c3226.04,3832.18) 3230.9,3827.32 3233.97,3830.39 3252.92,3849.34 cw(c3254.52,3847.73) 3254.52,3850 3254.52,3850.04 ccw(c3257.62,3853.14) 3272.52,3853.14 3272.52,3842 ccw(c3277.35,3842) 3273.93,3838.59 3315.52,3797 ccw(c3320.35,3801.83) 3320.35,3795 3343.52,3795 3480.45,3795 cw(c3480.45,3777.93) 3492.52,3790 3501.1,3790 3501.1,3747.82 cw(c3495.7,3747.82) 3499.52,3744 cw(c3495.7,3740.18) 3501.1,3740.18 3501.1,3595.47 3501.1,3590.81 ccw(c3550.33,3590.81) 3515.52,3556 ccw(c3565.95,3606.43) 3565.95,3535.11 3631.02,3535.11 3648.3,3535.11 ccw(c3648.3,3555.22) 3662.52,3541 3693.58,3509.94 ccw(c3751.97,3568.33) 3751.97,3485.75 4548.87,3485.75 cw(c4548.87,3476.35) 4555.52,3483 cw(c4545.86,3473.34) 4559.52,3473.34 4559.52,3464 4556.18,3464 ccw(c4556.18,3450.34) 4546.52,3460
9V on Bottom Layer "AutoNaming" (solid, remove dead copper, pour order 74): 4505.52,2692 4485.9,2692 cw(c4485.9,2736.38) 4454.52,2705 4453.78,2705.74 cw(c4493.05,2745) 4437.52,2745 4416.93,2745 ccw(c4416.93,2741.59) 4414.52,2744 cw(c4412.11,2746.41) 4412.11,2743 4340.52,2743 4282.93,2743 ccw(c4282.93,2739.59) 4280.52,2742 cw(c4266.03,2756.49) 4266.03,2736 4196.52,2736 4189.39,2736 ccw(c4189.39,2671.13) 4143.52,2717 cw(c4136.28,2724.24) 4136.28,2714 4063.52,2714 cw(c4063.52,2808.15) 3996.94,2741.58 3996.52,2742 cw(c3981.9,2756.62) 3981.9,2735.94 3941.77,2735.94 3933.91,2735.94 ccw(c3933.91,2657.61) 3878.52,2713 3869.81,2704.29 cw(c3799.1,2775) 3799.1,2675 3621.52,2675 2709.94,2675 cw(c2709.94,2775) 2639.23,2704.29 2636.52,2707 2634.81,2708.71 ccw(c2564.1,2638) 2564.1,2738 2556.52,2738 2359.26,2738 cw(c2359.26,2764.4) 2340.59,2745.73 2321.51,2726.65 cw(c2317.52,2730.64) 2317.52,2725 2304.9,2725 ccw(c2276.86,2753.04) 2316.52,2753.04 2316.52,2755 2269.59,2755 ccw(c2269.59,2737.93) 2257.52,2750 ccw(c2274.42,2733.1) 2250.52,2733.1 2250.52,2680 2250.52,2649.07 ccw(c2267.59,2649.07) 2255.52,2637 ccw(c2325.53,2707.01) 2325.53,2608 4688.52,2608 ccw(c4688.52,2634.56) 4707.3,2615.78 4708.52,2617 ccw(c4681.96,2643.56) 4719.52,2643.56 4719.52,2692 4719.52,2718 ccw(c4690.55,2689.03) 4690.55,2730 4681.52,2730 cw(c4674.28,2730) 4679.4,2724.88 4678.52,2724
GND on Bottom Layer "AutoNaming" (solid, remove dead copper, pour order 68): 249 vertices, not listed, extent 2249.52,2690 5404.52,4460
5V on Bottom Layer "AutoNaming" (solid, remove dead copper, pour order 72): 3984.52,2841 3909.32,2841 cw(c3909.32,2888.8) 3875.52,2855 ccw(c3841.72,2821.2) 3841.72,2869 3781.52,2869 3637.93,2869 cw(c3637.93,2872.41) 3635.52,2870 cw(c3650.01,2884.49) 3629.52,2884.49 3629.52,2891 cw(c3656.08,2891) 3637.3,2909.78 3644.52,2917 ccw(c3644.52,3015.98) 3714.51,2945.99 3725.52,2957 ccw(c3686.89,2995.63) 3741.52,2995.63 3741.52,3066 3741.52,3093.47 ccw(c3662.99,3093.47) 3718.52,3149 3704.59,3162.93 ccw(c3687.52,3145.86) 3687.52,3170 3687.52,3179.1 cw(c3711.42,3179.1) 3694.52,3196 cw(c3699.35,3200.83) 3692.52,3200.83 3692.52,3221 3768.31,3221 cw(c3768.31,3169.79) 3804.52,3206 cw(c3761.06,3162.54) 3822.52,3162.54 3822.52,3055 ccw(c3861.15,3055) 3833.83,3027.69 3859.52,3002 ccw(c3917.46,3059.94) 3917.46,2978 3980.52,2978 3980.52,2971.83 ccw(c3987.35,2971.83) 3982.52,2967 3982.52,2923 3982.52,2888 3982.2,2887.68
GND on Top Layer "Bottom Overlay-No Net" (solid, pour order 46): 5361.52,2770 5066.98,2770 cw(c5066.98,2831.46) 5023.52,2788 cw(c5064.56,2829.04) 5006.52,2829.04 5006.52,2918 cw(c5006.52,2920.41) 5004.81,2918.71 4993.52,2930 4895.52,2930 cw(c4893.11,2930) 4894.81,2928.29 4883.52,2917 ccw(c4885.93,2914.59) 4882.52,2914.59 4882.52,2707 4887.23,2702.29 ccw(c4957.94,2773) 4957.94,2673 5112.52,2673 5322.92,2673 ccw(c5322.92,2768.6) 5390.52,2701 5384.3,2707.22 cw(c5403.08,2726) 5376.52,2726
GND on Top Layer "Bottom Overlay-No Net" (solid, pour order 48): 4672.52,4436 4353.52,4436 ccw(c4366.23,4423.29) 4348.26,4423.29 4348.26,4409.68 ccw(c4348.26,4407.12) 4346.45,4408.93 4284.52,4347 cw(c4245.89,4385.63) 4245.89,4331 4142.52,4331 cw(c4142.52,4410.67) 4086.19,4354.33 4061.52,4379 ccw(c4001.16,4318.64) 4001.16,4404 3884.52,4404 3736.05,4404 ccw(c3736.05,4325.47) 3680.52,4381 3665.81,4366.29 ccw(c3736.52,4295.58) 3636.52,4295.58 3636.52,4125 3636.52,4074.42 cw(c3536.52,4074.42) 3607.23,4003.71 3584.52,3981 3494.81,3891.29 cw(c3424.1,3962) 3424.1,3862 3382.52,3862 3298.7,3862 ccw(c3298.7,3769.82) 3233.52,3835 ccw(c3272.15,3796.37) 3217.52,3796.37 3217.52,3614 3217.52,3574.42 ccw(c3317.52,3574.42) 3246.81,3503.71 3288.52,3462 3339.23,3411.29 cw(c3268.52,3340.58) 3368.52,3340.58 3368.52,3203 3376.74,3194.78 cw(c3357.96,3176) 3384.52,3176 ccw(c3384.52,3180.83) 3387.93,3177.41 3419.52,3209 ccw(c3414.69,3213.83) 3421.52,3213.83 3421.52,3220 cw(c3469.8,3220) 3435.66,3254.14 3438.52,3257 cw(c3501.29,3194.23) 3501.29,3283 3930.52,3283 ccw(c3930.52,3287.83) 3933.93,3284.41 3956.52,3307 ccw(c3922.72,3340.8) 3970.52,3340.8 3970.52,3460 ccw(c3941.55,3460) 3962.03,3480.49 3946.52,3496 3881.81,3560.71 cw(c3928.38,3607.28) 3862.52,3607.28 3862.52,3803 3862.52,4027.59 cw(c3865.93,4027.59) 3863.52,4030 3918.16,4084.64 cw(c3933.52,4069.27) 3933.52,4091 cw(c3933.52,3994.43) 4001.8,4062.72 4020.52,4044 4030.09,4034.43 cw(c3997.65,4002) 4043.52,4002 4069.45,4002 ccw(c4069.45,4019.07) 4081.52,4007 cw(c4076.69,4002.17) 4083.52,4002.17 4083.52,3968 4605.75,3968 ccw(c4605.75,4056.77) 4668.52,3994 4682.23,4007.71 ccw(c4611.52,4078.42) 4711.52,4078.42 4711.52,4408 ccw(c4682.55,4408) 4703.03,4428.49 4699.52,4432 ccw(c4692.28,4424.76) 4692.28,4435 4673.52,4435
5V on Top Layer "Bottom Overlay-No Net" (solid, pour order 52): 3905.52,3625 cw(c3907.93,3627.41) 3904.52,3627.41 3904.52,3817 cw(c3906.93,3817) 3905.23,3818.71 3925.52,3839 cw(c3915.86,3829.34) 3929.52,3829.34 3929.52,3814 ccw(c3934.35,3814) 3930.93,3810.59 3952.52,3789 3963.98,3777.54 ccw(c3972.52,3786.07) 3972.52,3774 cw(c3972.52,3766.76) 3977.64,3771.88 3989.52,3760 4011.57,3737.95 ccw(c4023.52,3749.9) 4023.52,3733 cw(c4023.52,3699.2) 4047.42,3723.1 4048.52,3722 ccw(c4072.66,3746.14) 4072.66,3712 4120.52,3712 cw(c4115.69,3707.17) 4122.52,3707.17 4122.52,3141 4122.52,3124.14 cw(c4088.38,3124.14) 4112.52,3100 cw(c4052.16,3160.36) 4052.16,3075 3497.52,3075 3297.94,3075 cw(c3297.94,3175) 3227.23,3104.29 3181.52,3150 3180.81,3150.71 cw(c3251.52,3221.42) 3151.52,3221.42 3151.52,4009 ccw(c3108.06,4009) 3138.79,4039.73 3108.52,4070 2999.81,4178.71 ccw(c2929.1,4108) 2929.1,4208 2912.52,4208 2912.52,4249.59 cw(c2915.93,4249.59) 2913.52,4252 cw(c2920.76,4259.24) 2910.52,4259.24 2910.52,4268 2974.1,4268 cw(c2974.1,4168) 3044.81,4238.71 3057.52,4226 3161.23,4122.29 cw(c3090.52,4051.58) 3190.52,4051.58 3190.52,3980 3190.52,3404 3190.52,3298.42 ccw(c3290.52,3298.42) 3219.81,3227.71 3255.52,3192 3270.23,3177.29 ccw(c3340.94,3248) 3340.94,3148 3396.52,3148 3603.34,3148 ccw(c3603.34,3240.18) 3668.52,3175 3679.38,3185.86 ccw(c3645.24,3220) 3693.52,3220 ccw(c3695.93,3222.41) 3695.93,3219 3970.52,3219 ccw(c3970.52,3257.63) 3997.83,3230.31 4011.52,3244 ccw(c3994.62,3260.9) 4018.52,3260.9 4018.52,3467 ccw(c3979.89,3467) 4007.21,3494.31 3986.52,3515 3927.03,3574.49 cw(c3976.53,3624) 3906.52,3624
NetC1_1 on Top Layer "Bottom Overlay-No Net" (solid, pour order 44): 5074.52,2893 ccw(c5074.52,2929.21) 5100.13,2903.61 5164.52,2968 5188.56,2992.04 ccw(c5175.54,3005.05) 5193.95,3005.05 5193.95,3140.19 ccw(c5103.71,3140.19) 5167.52,3204 ccw(c5114.41,3150.89) 5114.41,3226 5094.52,3226 4952.83,3226 ccw(c4952.83,3198.69) 4933.52,3218 cw(c4986.63,3164.89) 4986.63,3240 5006.52,3240 4591.73,3240 ccw(c4591.73,3188.79) 4555.52,3225 4545.81,3215.29 ccw(c4616.52,3144.58) 4516.52,3144.58 4516.52,3109 4516.52,3065.38 ccw(c4560.9,3065.38) 4529.52,3034 4551.23,3012.29 ccw(c4621.94,3083) 4621.94,2983 4809.52,2983 cw(c4816.76,2983) 4811.64,2988.12 4816.52,2993 ccw(c4804.45,3005.07) 4821.52,3005.07 4821.52,3061 4821.52,3070.58 cw(c4921.52,3070.58) 4850.81,3141.29 4854.52,3145 4886.19,3176.67 cw(c4942.52,3120.33) 4942.52,3200 5109.21,3200 cw(c5109.21,3172.69) 5128.52,3192 cw(c5077.82,3141.3) 5149.52,3141.3 5149.52,3058 5149.52,3022.42 cw(c5049.52,3022.42) 5120.23,2951.71 5114.52,2946 5104.22,2935.7 cw(c5100.9,2939.03) 5100.9,2934.33 cw(c5059.99,2934.33) 5088.92,2905.4 5085.52,2902
DC+ on Top Layer "Bottom Overlay-No Net" (solid, pour order 42): 5353.52,3381 cw(c5329.38,3405.14) 5329.38,3371 5067.52,3371 cw(c5103.73,3407.21) 5052.52,3407.21 5052.52,3521 5052.52,3733.51 cw(c5073.01,3733.51) 5058.52,3748 ccw(c5046.45,3760.07) 5063.52,3760.07 5063.52,3846 5197.99,3846 cw(c5197.99,3767.47) 5253.52,3823 5366.23,3710.29 cw(c5295.52,3639.58) 5395.52,3639.58 5395.52,3427 cw(c5364.14,3427) 5386.33,3404.81 5381.52,3400 cw(c5369.45,3412.07) 5369.45,3395 5368.52,3395
GND on Top Layer "Bottom Overlay-No Net" (solid, pour order 50): 4083.52,3968 3867.96,3968 ccw(c3867.96,3960.3) 3862.52,3965.74 cw(c3913.22,4016.44) 3841.52,4016.44 3841.52,4026 3841.52,4030.58 cw(c3941.52,4030.58) 3870.81,4101.29 3883.52,4114 cw(c3939.05,4058.47) 3939.05,4137 3959.52,4137 4030.69,4137 ccw(c4030.69,4143.83) 4035.52,4139 ccw(c4100.7,4204.18) 4100.7,4112 4105.52,4112 cw(c4105.52,4083.03) 4126.01,4103.51 4182.52,4047 cw(c4172.86,4037.34) 4186.52,4037.34 4186.52,4003 4186.52,3998.41 cw(c4183.11,3998.41) 4185.52,3996

## Keep-outs
Keep-Out Layer:
  lines w10: 2050,3239 cw(c2041.5,3230.5) 2053.52,3230.5 2053.52,2581 5596.84,2581 5596.84,3182.62 ; 2050.97,3234.98 cw(c3851.93,2915.02) 3002.52,4535 4653.52,4535 ; 4644.52,4535 cw(c3719.67,2875.19) 5594.1,3186.37 ; 5456.5,2582 5596.84,2582 ; 5596.84,3182.62 cw(c5597.38,3182.62) 5597,3183 ccw(c5597.38,3182.62) 5596.84,3182.62

## Other copper
Top Layer:
  text "智能消防联动系统 / 青岛理工大学 / 岳英豪  刘宇阳 / 2017.05.04" at 2480,2762 h100

## Silkscreen, mask and mechanical layers (free items; w line width, h text height)
Top Overlay:
  text "+" at 5158,3686 h60
Top Solder:
  text "智能消防联动系统 / 青岛理工大学 / 岳英豪  刘宇阳 / 2017.05.04" at 2480,2762 h100

## Text inside footprints (layer, text, board x,y; h text height)
DPLC-L1: Top Overlay "5V" at 4182,3681 h60